# EAGLE board Trevor-th (EAGLE 7.2.0)
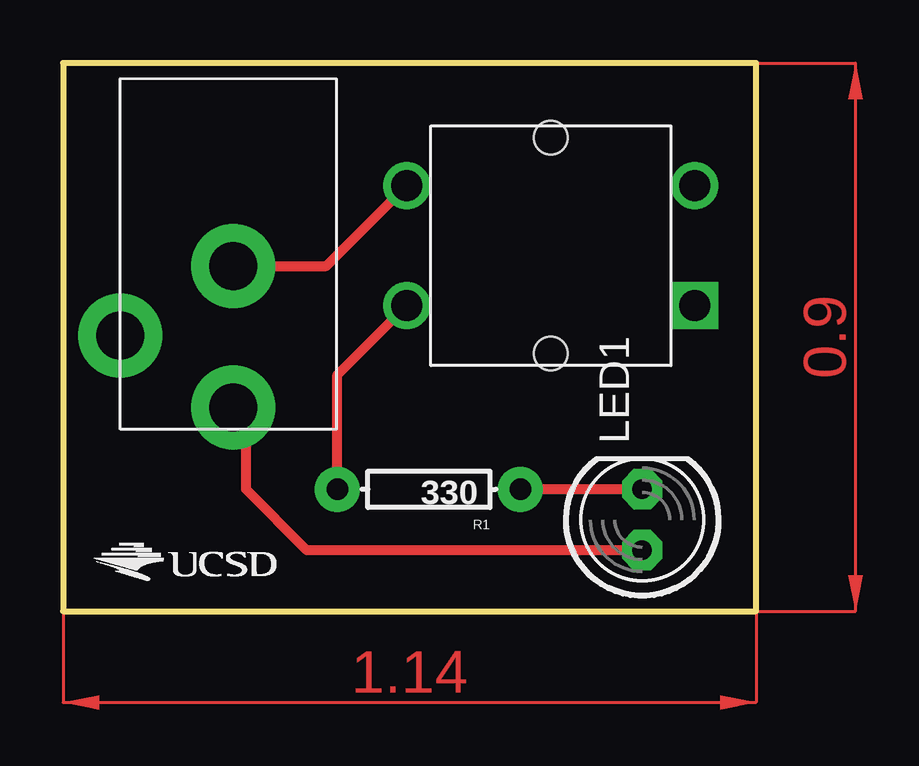
[diagram p0: board, top side]

Size 28.88 x 22.85 mm. Coordinates in mm from the lower left corner, seen from the top.
Outline: 0,0 28.88,0 28.88,22.85 0,22.85 0,0
Copper layers (1*16): Top 0.035559375mm / dielectric 1.501140625mm / Bottom 0.035559375mm
Design rules "4pcb-33board": minimum track width 10mil, minimum drill 15mil, track to track 6mil, track to pad 6mil, pad to pad 6mil, via to via 6mil, smd to smd 6mil, copper to edge 10mil, drill to drill 10mil, minimum pad ring 10mil, minimum via ring 8mil, stop-mask expansion 4mil, vias tented up to drill 0mil, thermal gap 10mil

## Footprints (pad centres in the part's own frame; a part is rotated, then mirrored left to right if it is on the bottom)
PJ-102A = drill 2 pad 3.5: RING -6.77,-4.345; RING_SW -3.87,-9.045; TIP -0.87,-4.345
LED5MM = drill 0.813 pad 1.676 octagon: A -1.27,0; K 1.27,0
AXIAL-0.3 = drill 0.9 pad 1.88: P$1 -3.81,0; P$2 3.81,0
BUTTON-TACTILE-SQUARE-ADAFRUIT1010 = drill 1.3 square: P -6,2.5 | drill 1.3: P2 6,2.5; S -6,-2.5; S2 6,-2.5 | hole 1.4: 0,4.5; 0,-4.5

## Placement (x,y rotation side)
J1  2.1MMJACKTHM  [PJ-102A]  11.43,7.62 270 top
LED1  Red  [LED5MM]  24.13,3.81 90 top
R1  330  [AXIAL-0.3]  15.24,5.08 180 top
S1  BUTTON-TACTILE-SQUARE  [BUTTON-TACTILE-SQUARE-ADAFRUIT1010]  20.32,15.24 180 top
U$1  [UCSD_LOGO]  1.27,1.27 0 top

## Library data of the parts
J1 LED1 R1 S1 = Lab2
U$1 = Logo

## Nets
N$1: J1.TIP LED1.A
N$2: LED1.K R1.P$1
N$3: R1.P$2 S1.P2
N$4: J1.RING S1.S2

## Tracks (layer width: path | path; a pad name or v marks a point on that pad's centre or on a via)
N$1
  Top 0.406: LED1.A 10.16,2.54 7.62,5.08 7.62,7.96 J1.TIP
N$2
  Top 0.406: LED1.K R1.P$1
N$3
  Top 0.406: R1.P$2 11.43,9.85 S1.P2
N$4
  Top 0.406: J1.RING 10.97,14.39 S1.S2
(copper drawn outside any net)
  shapes: Top area x2